# Altium PCB BikerBlinker.PcbDoc
Units mm, origin at the board's own origin, x right, y up, seen from the top; angles counter-clockwise.
Board outline 60 x 57.5 mm, 2 copper layers (Top Layer, Bottom Layer); 44 components, 33 nets, 181 pads, 26 vias.
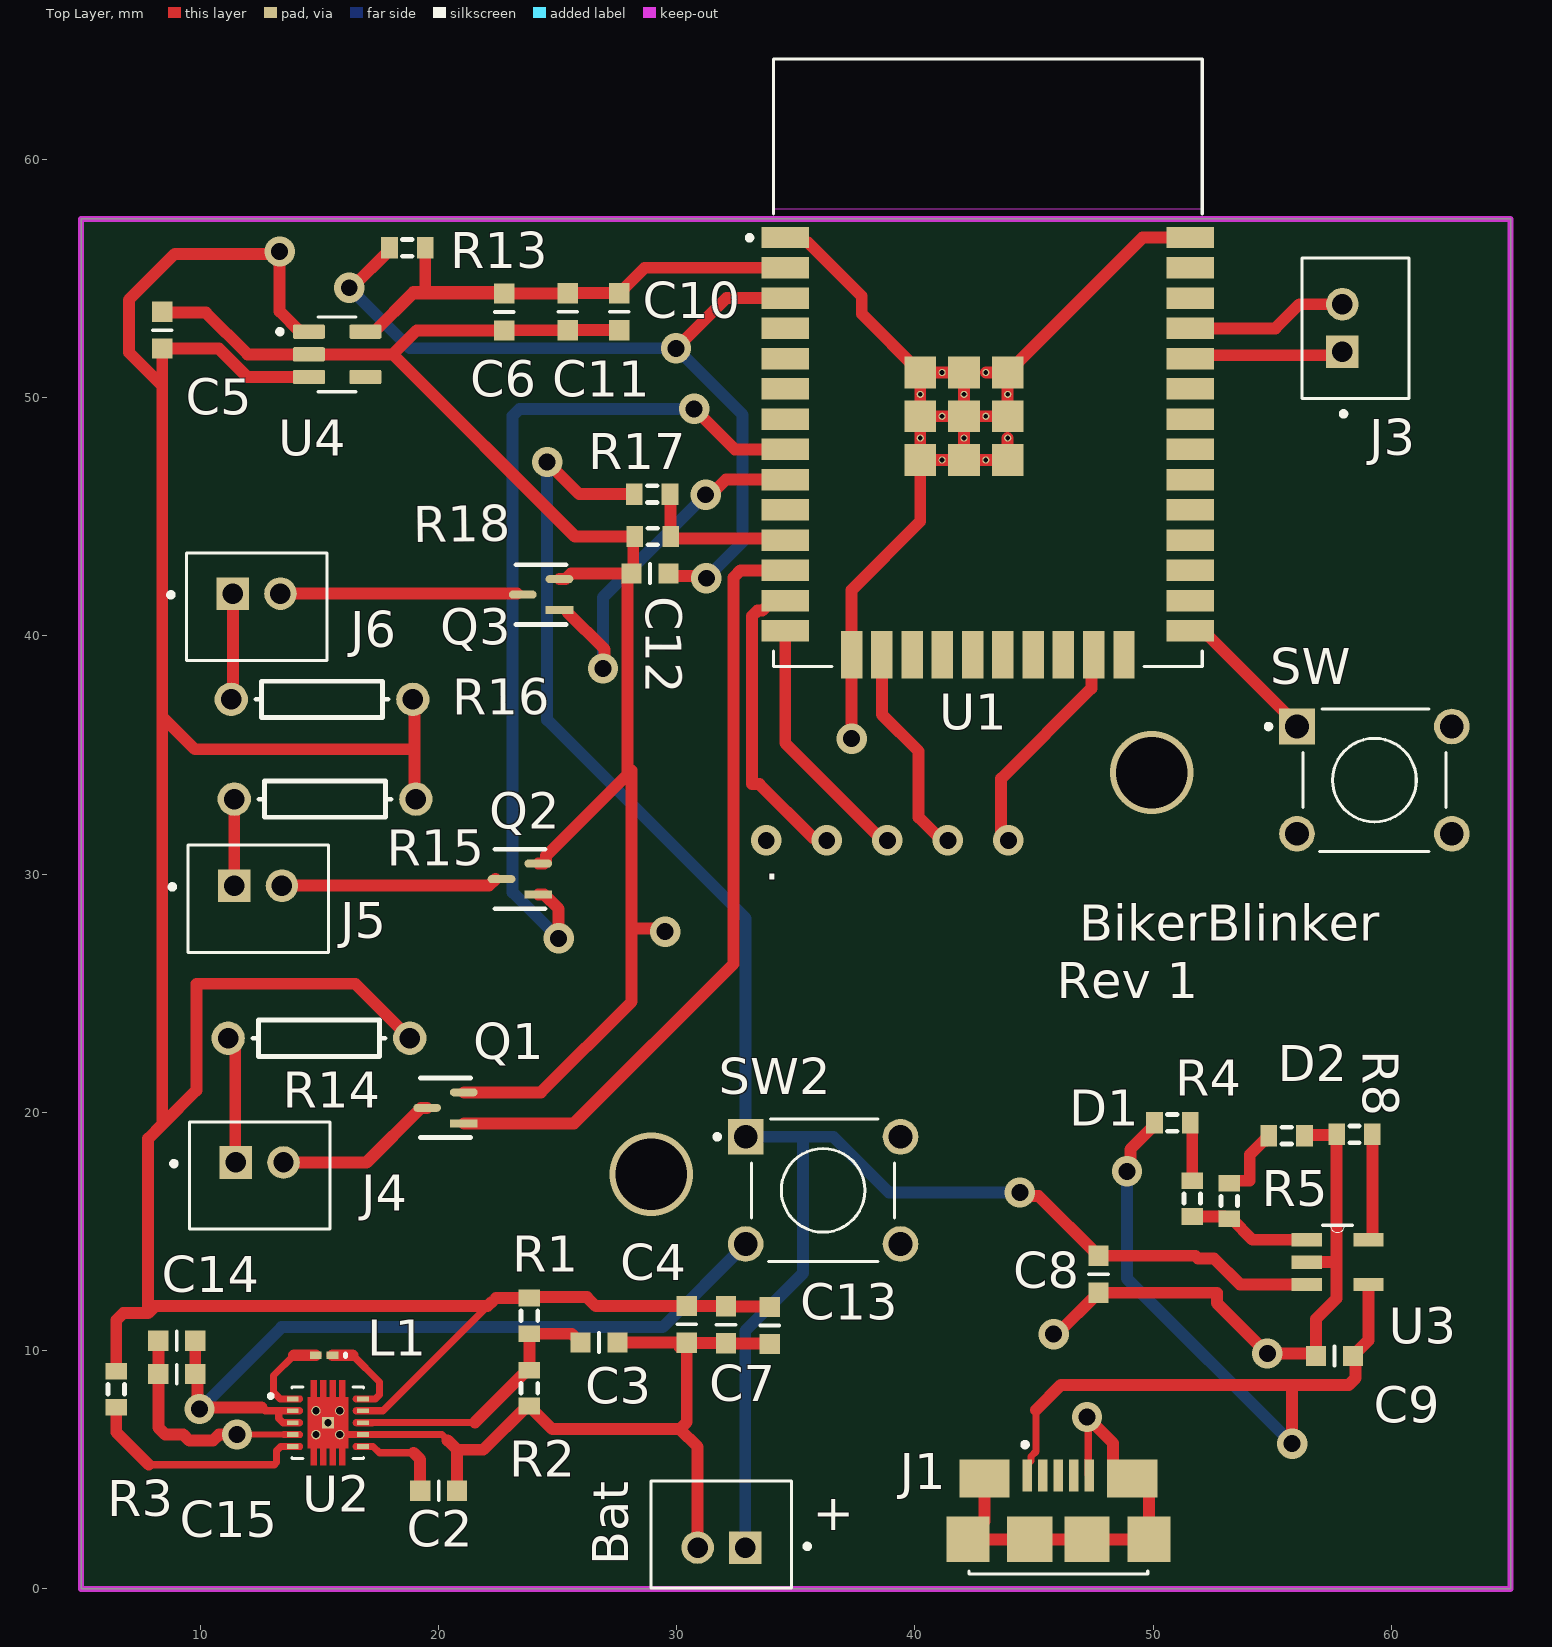
[diagram p0: Top Layer view]
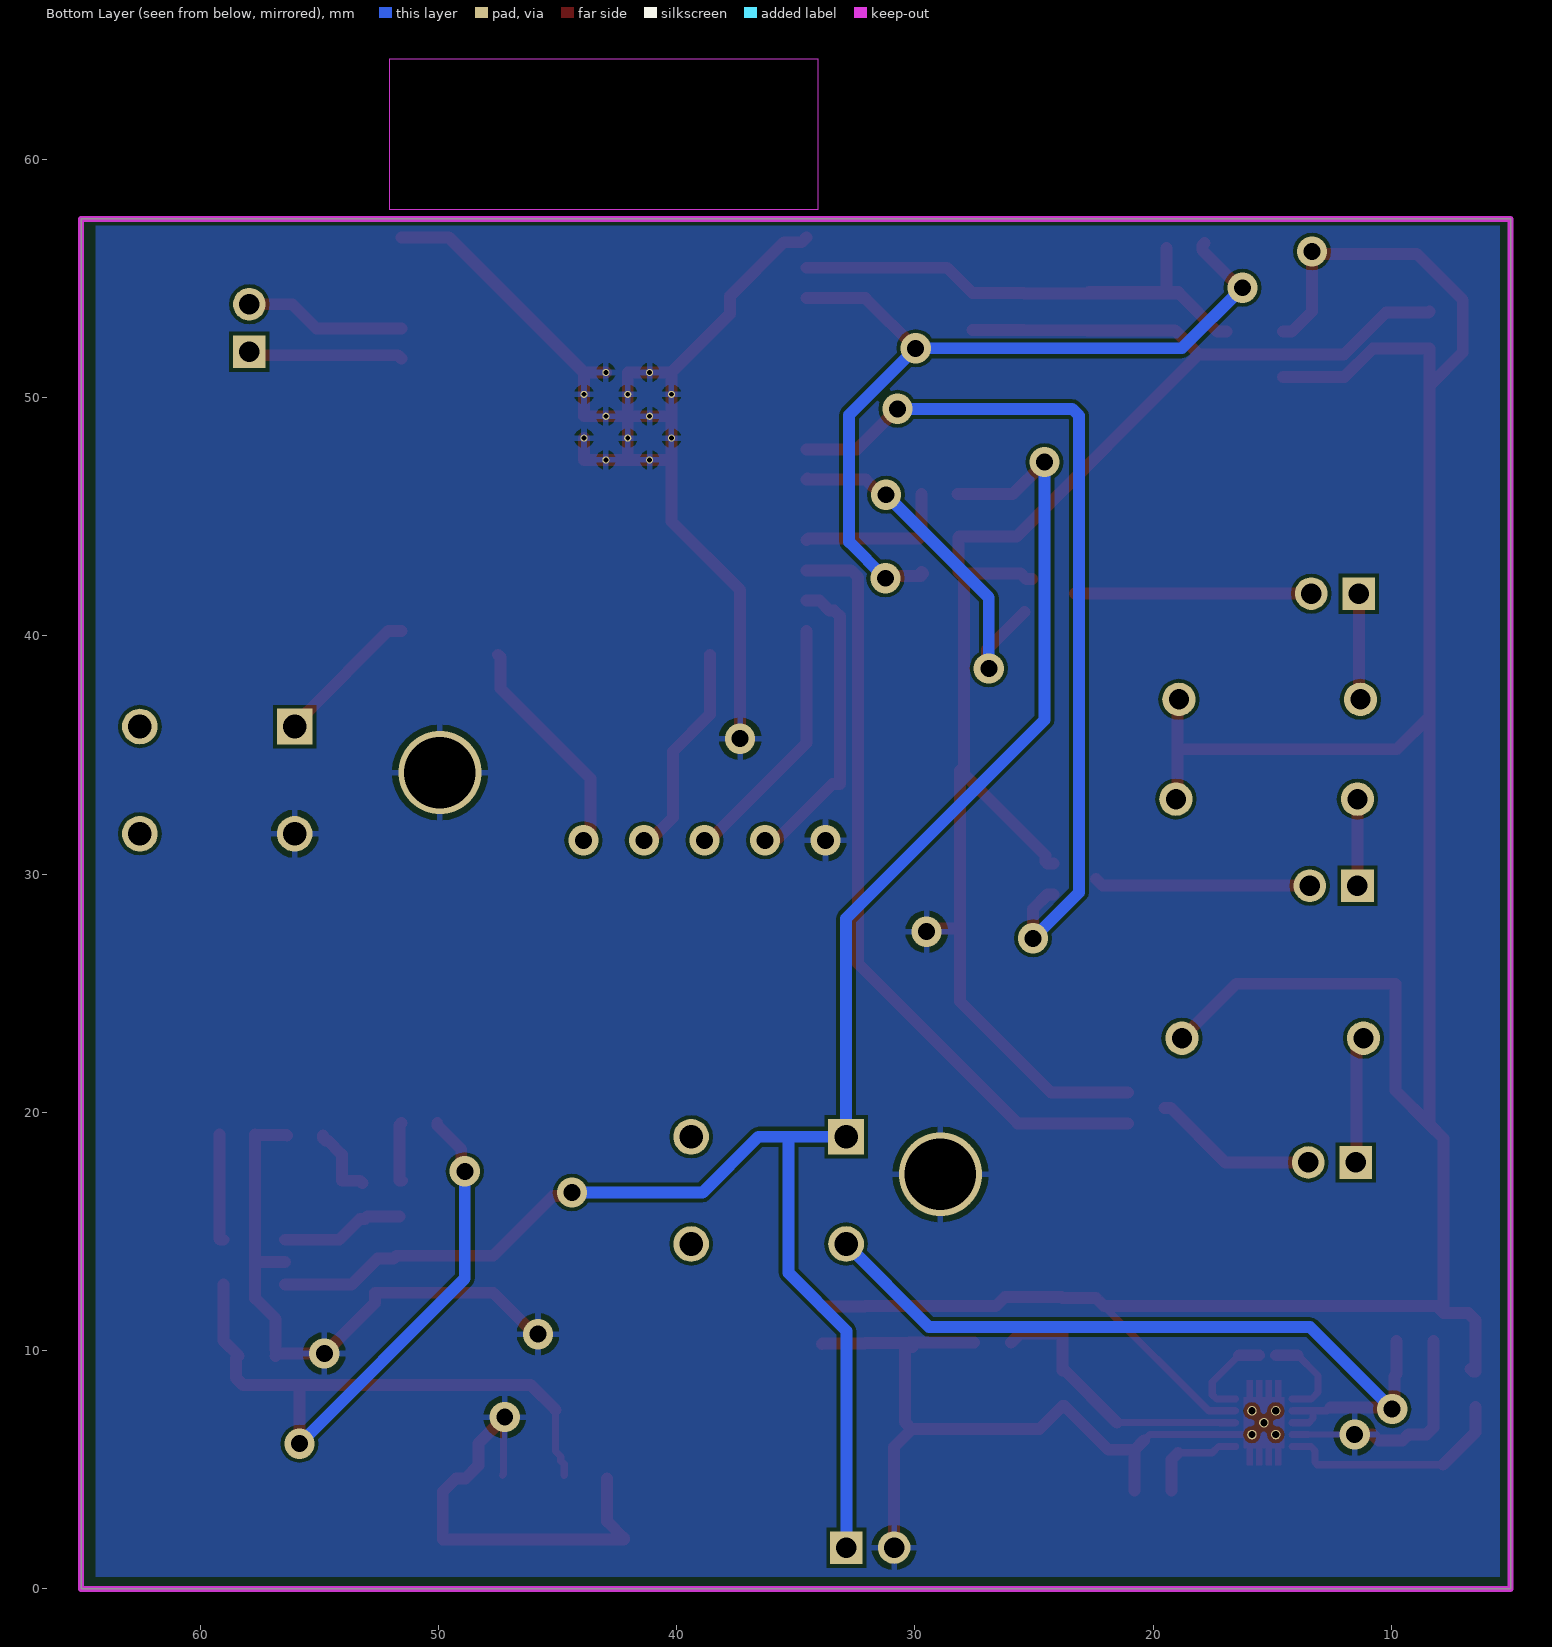
[diagram p1: Bottom Layer view, seen from below]

## Layer stack, top to bottom
Top Solder: solder mask 0.0102, Solder Resist, Dk 3.5
Top Layer: signal copper 0.0356
Dielectric 1: dielectric 0.32, FR-4, Dk 4.8
Bottom Layer: signal copper 0.0356
Bottom Solder: solder mask 0.0102, Solder Resist, Dk 3.5

## Board outline
65,0 5,0 5,57.5 65,57.5

## Design rules (kind name [scope] priority, off if disabled: settings)
Clearance [All] p1: gap=0.152 ignorepadtopadclearanceinfootprint=FALSE
HoleSize [All] p1: absolutevalues=TRUE maxlimit=3 minlimit=0.025 maxpercent=80.000 minpercent=20.000
MinimumSolderMaskSliver [All] p1: minsoldermaskwidth=0.046
NetAntennae [All] p1 off: netantennaetolerance=30
PolygonConnect [All] p1: connectstyle=Relief reliefconductorwidth=0.254 reliefentries=4 polygonreliefangle="90 Angle" airgapwidth=0.254
RoomDefinition BikerBlinker [InComponentClass('BikerBlinker')] p1: confinementstyle=ConfineIn formatcopy=TRUE lockcomponents=FALSE outline -0.025,-0.559 92.5,-0.559 92.5,65 -0.025,65
RoutingVias [All] p1: holewidth=0.3 width=0.6 viastyle="Through Hole" minholewidth=0.3 minwidth=0.6 maxholewidth=3 maxwidth=3.5
SilkToSolderMaskClearance [IsText] p1: minsilkscreentomaskgap=0.254 clearancetoexposedcopper=TRUE
SolderMaskExpansion [All] p1: expansion=0.102 istentingtop=FALSE
Width [All] p1: maxlimit=1 minlimit=0.152 preferedwidth=0.5 minimp=50.000000 maximp=50.000000 favimp=50.000000
26 further rules are at their usual default settings.

## Components (designator, comment, footprint, x,y, rotation, side; value= is the part's Value field where it differs from the comment)
Bat "B2B-PH-K-S" JST_B2B-PH-K-S(LF)(SN) 31.877,2.286 r0 top
C2 "0.10µF" SMD-0603C 20.006,4.12 r90 top
C3 "10pF" SMD-0603C 26.737,10.343 r90 top
C4 "22µF" SMD-0603C 30.42,11.105 r0 top
C5 "1µF" SMD-0603C 8.407,52.832 r180 top
C6 "1µF" SMD-0603C 22.758,53.594 r0 top
C7 "22µF" SMD-0603C 32.071,11.092 r0 top
C8 "4.7µF" SMD-0603C 47.701,13.208 r0 top
C9 "10µF" SMD-0603C 57.607,9.779 r270 top
C10 "10µF" SMD-0603C 27.584,53.607 r0 top
C11 "0.10µF" SMD-0603C 25.425,53.607 r0 top
C12 "0.10µF" SMD-0603C 28.88,42.621 r90 top
C13 "22µF" SMD-0603C 33.9,11.054 r0 top
C14 "10µF" SMD-0603C 9.017,10.414 r270 top
C15 "10µF" SMD-0603C 9.017,9.017 r270 top
D1 "RED" J1-0603 50.8,19.558 r0 top
D2 "GREEN" J1-0603 55.601,19.025 r0 top
J1 "10118192-0002LF" AMPHENOL_10118192-0002LF 46.019,4.758 r0 top
J3 "B2B-PH-K-S" JST_B2B-PH-K-S(LF)(SN) 58.487,52.918 r270 top
J4 "Right" JST_B2B-PH-K-S(LF)(SN) 12.497,17.348 r180 top
J5 "Center" JST_B2B-PH-K-S(LF)(SN) 12.43,28.965 r180 top
J6 "Left" JST_B2B-PH-K-S(LF)(SN) 12.37,41.224 r180 top
L1 "1uH" 0603 15.2,9.809 r180 top
Q1 "2N7002W" FP-419AB-01-IPC_C 20.295,20.193 r180 top
Q2 "2N7002W" FP-419AB-01-IPC_C 23.419,29.794 r180 top
Q3 "2N7002W" FP-419AB-01-IPC_C 24.308,41.732 r180 top
R1 "1M" J1-0603 23.816,11.462 r90 top
R2 "111k" J1-0603 23.816,8.426 r90 top
R3 "1M" J1-0603 6.477,8.382 r90 top
R4 "470" J1-0603 51.638,16.383 r270 top
R5 "470" J1-0603 53.188,16.281 r90 top value=1K
R8 "2k" J1-0603 58.445,19.075 r0 top
R13 "10k" J1-0603 18.694,56.286 r0 top
R14 "20" AXIAL-0.3 14.986,23.114 r0 top
R15 "20" AXIAL-0.3 15.24,33.147 r0 top
R16 "20" AXIAL-0.3 15.113,37.338 r0 top
R17 "20M" J1-0603 28.969,45.949 r180 top
R18 "30M" J1-0603 28.995,44.171 r0 top
SW "1825910-6" SW_1825910-6-4 59.282,33.945 r0 top
SW2 "1825910-6" SW_1825910-6-4 36.143,16.728 r0 top
U1 "ESP32-WROOM-32D" MODULE_ESP32-WROOM-32D 43.056,51.459 r0 top
U2 "TPS63061DSCR" CONV_TPS63061DSCR 15.359,6.977 r0 top locked
U3 "MCP73831T" SOT95P280X145-5N 57.734,13.716 r0 top
U4 "AP2112K-3.3TRG1" SOT95P285X140-5N 15.748,51.816 r0 top

## Footprints (in the part's own frame and the unit in brackets; to place one, negate y for a bottom-side part, rotate by r counter-clockwise, add the part's x,y. Pads: shape width x height; smd on the part's side, far side on the other; paste and mask are expansions set on the pad)
0603 [mm] "Chip Inductor, Body 0.6x0.3mm, IPC High Density"
  rect 0.5x0.3 smd: 1(-0.35,0) 2(0.35,0)
  silkscreen extent -0.9,-0.05 -0.9,0.05, body extent -0.33,-0.18 0.33,0.18, height 0.55
AMPHENOL_10118192-0002LF [mm]
  rect 0.4x1.35 smd: 1(-1.3,0) 2(-0.65,0) 3(0,0) 4(0.65,0) 5(1.3,0)
  rect 2.1x1.6 smd: S1(-3.1,-0.125) S2(3.1,-0.125)
  rect 1.8x1.9 smd: S3(-3.8,-2.675) S6(3.8,-2.675)
  rect 1.9x1.9 smd: S4(-1.2,-2.675) S5(1.2,-2.675)
  silkscreen extent -3.75,-4.13 3.75,1.4
AXIAL-0.3 [mm] "Axial Device, Thru-Hole; 2 Leads; 0.3 in Pin Spacing"
  round 1.4 hole 0.85: 1(-3.81,0) 2(3.81,0)
  silkscreen extent -2.77,-0.76 2.77,0.76
CONV_TPS63061DSCR [mm]
  rect 0.5x0.2 smd: 1(-1.475,1) 2(-1.475,0.5) 3(-1.475,0) 4(-1.475,-0.5) 5(-1.475,-1) 6(1.475,-1) 7(1.475,-0.5) 8(1.475,0) 9(1.475,0.5) 10(1.475,1)
  rect 0.5x0.5 smd: 11(0,0)
  round 0.4 hole 0.3: 12(-0.5,0.5) 13(0.5,0.5) 14(-0.5,-0.5) 15(0,0) 16(0.5,-0.5)
  Top Layer region: 0.725,1.075 0.85,1.075 0.85,-1.075 0.725,-1.075 0.725,-1.775 0.475,-1.775 0.475,-1.075 0.325,-1.075 0.325,-1.775 0.075,-1.775 0.075,-1.075 -0.075,-1.075 -0.075,-1.775 -0.325,-1.775 -0.325,-1.075 -0.475,-1.075 -0.475,-1.775 -0.725,-1.775 -0.725,-1.075 -0.85,-1.075 -0.85,1.075 -0.725,1.075 -0.725,1.775 -0.475,1.775 -0.475,1.075 -0.325,1.075 -0.325,1.775 -0.075,1.775 -0.075,1.075 0.075,1.075 0.075,1.775 0.325,1.775 0.325,1.075 0.475,1.075 0.475,1.775 0.725,1.775
  Top Layer region: 1.9,-0.64 1.19,-0.64 1.183,-0.64 1.175,-0.639 1.168,-0.638 1.161,-0.637 1.154,-0.635 1.147,-0.633 1.14,-0.631 1.133,-0.628 1.126,-0.625 1.12,-0.621 1.114,-0.617 1.108,-0.613 1.102,-0.609 1.096,-0.604 1.091,-0.599 1.086,-0.594 1.081,-0.588 1.077,-0.582 1.073,-0.576 1.069,-0.57 1.065,-0.564 1.062,-0.557 1.059,-0.55 1.057,-0.543 1.055,-0.536 1.053,-0.529 1.052,-0.522 1.051,-0.515 1.05,-0.507 1.05,-0.5 1.05,-0.493 1.051,-0.485 1.052,-0.478 1.053,-0.471 1.055,-0.464 1.057,-0.457 1.059,-0.45 1.062,-0.443 1.065,-0.436 1.069,-0.43 1.073,-0.424 1.077,-0.418 1.081,-0.412 1.086,-0.406 1.091,-0.401 1.096,-0.396 1.102,-0.391 1.108,-0.387 1.114,-0.383 1.12,-0.379 1.126,-0.375 1.133,-0.372 1.14,-0.369 1.147,-0.367 1.154,-0.365 1.161,-0.363 1.168,-0.362 1.175,-0.361 1.183,-0.36 1.19,-0.36 1.9,-0.36
  Top Layer region: -1.183,1.14 -1.175,1.139 -1.168,1.138 -1.161,1.137 -1.154,1.135 -1.147,1.133 -1.14,1.131 -1.133,1.128 -1.126,1.125 -1.12,1.121 -1.114,1.117 -1.108,1.113 -1.102,1.109 -1.096,1.104 -1.091,1.099 -1.086,1.094 -1.081,1.088 -1.077,1.082 -1.073,1.076 -1.069,1.07 -1.065,1.064 -1.062,1.057 -1.059,1.05 -1.057,1.043 -1.055,1.036 -1.053,1.029 -1.052,1.022 -1.051,1.015 -1.05,1.007 -1.05,1 -1.05,0.993 -1.051,0.985 -1.052,0.978 -1.053,0.971 -1.055,0.964 -1.057,0.957 -1.059,0.95 -1.062,0.943 -1.065,0.936 -1.069,0.93 -1.073,0.924 -1.077,0.918 -1.081,0.912 -1.086,0.906 -1.091,0.901 -1.096,0.896 -1.102,0.891 -1.108,0.887 -1.114,0.883 -1.12,0.879 -1.126,0.875 -1.133,0.872 -1.14,0.869 -1.147,0.867 -1.154,0.865 -1.161,0.863 -1.168,0.862 -1.175,0.861 -1.183,0.86 -1.19,0.86 -1.9,0.86 -1.9,1.14 -1.19,1.14
  Top Layer region: -1.183,0.64 -1.175,0.639 -1.168,0.638 -1.161,0.637 -1.154,0.635 -1.147,0.633 -1.14,0.631 -1.133,0.628 -1.126,0.625 -1.12,0.621 -1.114,0.617 -1.108,0.613 -1.102,0.609 -1.096,0.604 -1.091,0.599 -1.086,0.594 -1.081,0.588 -1.077,0.582 -1.073,0.576 -1.069,0.57 -1.065,0.564 -1.062,0.557 -1.059,0.55 -1.057,0.543 -1.055,0.536 -1.053,0.529 -1.052,0.522 -1.051,0.515 -1.05,0.507 -1.05,0.5 -1.05,0.493 -1.051,0.485 -1.052,0.478 -1.053,0.471 -1.055,0.464 -1.057,0.457 -1.059,0.45 -1.062,0.443 -1.065,0.436 -1.069,0.43 -1.073,0.424 -1.077,0.418 -1.081,0.412 -1.086,0.406 -1.091,0.401 -1.096,0.396 -1.102,0.391 -1.108,0.387 -1.114,0.383 -1.12,0.379 -1.126,0.375 -1.133,0.372 -1.14,0.369 -1.147,0.367 -1.154,0.365 -1.161,0.363 -1.168,0.362 -1.175,0.361 -1.183,0.36 -1.19,0.36 -1.9,0.36 -1.9,0.64 -1.19,0.64
  Top Layer region: -1.183,0.14 -1.175,0.139 -1.168,0.138 -1.161,0.137 -1.154,0.135 -1.147,0.133 -1.14,0.131 -1.133,0.128 -1.126,0.125 -1.12,0.121 -1.114,0.117 -1.108,0.113 -1.102,0.109 -1.096,0.104 -1.091,0.099 -1.086,0.094 -1.081,0.088 -1.077,0.082 -1.073,0.076 -1.069,0.07 -1.065,0.064 -1.062,0.057 -1.059,0.05 -1.057,0.043 -1.055,0.036 -1.053,0.029 -1.052,0.022 -1.051,0.015 -1.05,0.007 -1.05,0 -1.05,-0.007 -1.051,-0.015 -1.052,-0.022 -1.053,-0.029 -1.055,-0.036 -1.057,-0.043 -1.059,-0.05 -1.062,-0.057 -1.065,-0.064 -1.069,-0.07 -1.073,-0.076 -1.077,-0.082 -1.081,-0.088 -1.086,-0.094 -1.091,-0.099 -1.096,-0.104 -1.102,-0.109 -1.108,-0.113 -1.114,-0.117 -1.12,-0.121 -1.126,-0.125 -1.133,-0.128 -1.14,-0.131 -1.147,-0.133 -1.154,-0.135 -1.161,-0.137 -1.168,-0.138 -1.175,-0.139 -1.183,-0.14 -1.19,-0.14 -1.9,-0.14 -1.9,0.14 -1.19,0.14
  Top Layer region: -1.183,-0.36 -1.175,-0.361 -1.168,-0.362 -1.161,-0.363 -1.154,-0.365 -1.147,-0.367 -1.14,-0.369 -1.133,-0.372 -1.126,-0.375 -1.12,-0.379 -1.114,-0.383 -1.108,-0.387 -1.102,-0.391 -1.096,-0.396 -1.091,-0.401 -1.086,-0.406 -1.081,-0.412 -1.077,-0.418 -1.073,-0.424 -1.069,-0.43 -1.065,-0.436 -1.062,-0.443 -1.059,-0.45 -1.057,-0.457 -1.055,-0.464 -1.053,-0.471 -1.052,-0.478 -1.051,-0.485 -1.05,-0.493 -1.05,-0.5 -1.05,-0.507 -1.051,-0.515 -1.052,-0.522 -1.053,-0.529 -1.055,-0.536 -1.057,-0.543 -1.059,-0.55 -1.062,-0.557 -1.065,-0.564 -1.069,-0.57 -1.073,-0.576 -1.077,-0.582 -1.081,-0.588 -1.086,-0.594 -1.091,-0.599 -1.096,-0.604 -1.102,-0.609 -1.108,-0.613 -1.114,-0.617 -1.12,-0.621 -1.126,-0.625 -1.133,-0.628 -1.14,-0.631 -1.147,-0.633 -1.154,-0.635 -1.161,-0.637 -1.168,-0.638 -1.175,-0.639 -1.183,-0.64 -1.19,-0.64 -1.9,-0.64 -1.9,-0.36 -1.19,-0.36
  Top Layer region: -1.183,-0.86 -1.175,-0.861 -1.168,-0.862 -1.161,-0.863 -1.154,-0.865 -1.147,-0.867 -1.14,-0.869 -1.133,-0.872 -1.126,-0.875 -1.12,-0.879 -1.114,-0.883 -1.108,-0.887 -1.102,-0.891 -1.096,-0.896 -1.091,-0.901 -1.086,-0.906 -1.081,-0.912 -1.077,-0.918 -1.073,-0.924 -1.069,-0.93 -1.065,-0.936 -1.062,-0.943 -1.059,-0.95 -1.057,-0.957 -1.055,-0.964 -1.053,-0.971 -1.052,-0.978 -1.051,-0.985 -1.05,-0.993 -1.05,-1 -1.05,-1.007 -1.051,-1.015 -1.052,-1.022 -1.053,-1.029 -1.055,-1.036 -1.057,-1.043 -1.059,-1.05 -1.062,-1.057 -1.065,-1.064 -1.069,-1.07 -1.073,-1.076 -1.077,-1.082 -1.081,-1.088 -1.086,-1.094 -1.091,-1.099 -1.096,-1.104 -1.102,-1.109 -1.108,-1.113 -1.114,-1.117 -1.12,-1.121 -1.126,-1.125 -1.133,-1.128 -1.14,-1.131 -1.147,-1.133 -1.154,-1.135 -1.161,-1.137 -1.168,-1.138 -1.175,-1.139 -1.183,-1.14 -1.19,-1.14 -1.9,-1.14 -1.9,-0.86 -1.19,-0.86
  Top Layer region: 1.9,-1.14 1.19,-1.14 1.183,-1.14 1.175,-1.139 1.168,-1.138 1.161,-1.137 1.154,-1.135 1.147,-1.133 1.14,-1.131 1.133,-1.128 1.126,-1.125 1.12,-1.121 1.114,-1.117 1.108,-1.113 1.102,-1.109 1.096,-1.104 1.091,-1.099 1.086,-1.094 1.081,-1.088 1.077,-1.082 1.073,-1.076 1.069,-1.07 1.065,-1.064 1.062,-1.057 1.059,-1.05 1.057,-1.043 1.055,-1.036 1.053,-1.029 1.052,-1.022 1.051,-1.015 1.05,-1.007 1.05,-1 1.05,-0.993 1.051,-0.985 1.052,-0.978 1.053,-0.971 1.055,-0.964 1.057,-0.957 1.059,-0.95 1.062,-0.943 1.065,-0.936 1.069,-0.93 1.073,-0.924 1.077,-0.918 1.081,-0.912 1.086,-0.906 1.091,-0.901 1.096,-0.896 1.102,-0.891 1.108,-0.887 1.114,-0.883 1.12,-0.879 1.126,-0.875 1.133,-0.872 1.14,-0.869 1.147,-0.867 1.154,-0.865 1.161,-0.863 1.168,-0.862 1.175,-0.861 1.183,-0.86 1.19,-0.86 1.9,-0.86
  Top Layer region: 1.9,-0.14 1.19,-0.14 1.183,-0.14 1.175,-0.139 1.168,-0.138 1.161,-0.137 1.154,-0.135 1.147,-0.133 1.14,-0.131 1.133,-0.128 1.126,-0.125 1.12,-0.121 1.114,-0.117 1.108,-0.113 1.102,-0.109 1.096,-0.104 1.091,-0.099 1.086,-0.094 1.081,-0.088 1.077,-0.082 1.073,-0.076 1.069,-0.07 1.065,-0.064 1.062,-0.057 1.059,-0.05 1.057,-0.043 1.055,-0.036 1.053,-0.029 1.052,-0.022 1.051,-0.015 1.05,-0.007 1.05,0 1.05,0.007 1.051,0.015 1.052,0.022 1.053,0.029 1.055,0.036 1.057,0.043 1.059,0.05 1.062,0.057 1.065,0.064 1.069,0.07 1.073,0.076 1.077,0.082 1.081,0.088 1.086,0.094 1.091,0.099 1.096,0.104 1.102,0.109 1.108,0.113 1.114,0.117 1.12,0.121 1.126,0.125 1.133,0.128 1.14,0.131 1.147,0.133 1.154,0.135 1.161,0.137 1.168,0.138 1.175,0.139 1.183,0.14 1.19,0.14 1.9,0.14
  Top Layer region: 1.9,0.36 1.19,0.36 1.183,0.36 1.175,0.361 1.168,0.362 1.161,0.363 1.154,0.365 1.147,0.367 1.14,0.369 1.133,0.372 1.126,0.375 1.12,0.379 1.114,0.383 1.108,0.387 1.102,0.391 1.096,0.396 1.091,0.401 1.086,0.406 1.081,0.412 1.077,0.418 1.073,0.424 1.069,0.43 1.065,0.436 1.062,0.443 1.059,0.45 1.057,0.457 1.055,0.464 1.053,0.471 1.052,0.478 1.051,0.485 1.05,0.493 1.05,0.5 1.05,0.507 1.051,0.515 1.052,0.522 1.053,0.529 1.055,0.536 1.057,0.543 1.059,0.55 1.062,0.557 1.065,0.564 1.069,0.57 1.073,0.576 1.077,0.582 1.081,0.588 1.086,0.594 1.091,0.599 1.096,0.604 1.102,0.609 1.108,0.613 1.114,0.617 1.12,0.621 1.126,0.625 1.133,0.628 1.14,0.631 1.147,0.633 1.154,0.635 1.161,0.637 1.168,0.638 1.175,0.639 1.183,0.64 1.19,0.64 1.9,0.64
  Top Layer region: 1.9,0.86 1.19,0.86 1.183,0.86 1.175,0.861 1.168,0.862 1.161,0.863 1.154,0.865 1.147,0.867 1.14,0.869 1.133,0.872 1.126,0.875 1.12,0.879 1.114,0.883 1.108,0.887 1.102,0.891 1.096,0.896 1.091,0.901 1.086,0.906 1.081,0.912 1.077,0.918 1.073,0.924 1.069,0.93 1.065,0.936 1.062,0.943 1.059,0.95 1.057,0.957 1.055,0.964 1.053,0.971 1.052,0.978 1.051,0.985 1.05,0.993 1.05,1 1.05,1.007 1.051,1.015 1.052,1.022 1.053,1.029 1.055,1.036 1.057,1.043 1.059,1.05 1.062,1.057 1.065,1.064 1.069,1.07 1.073,1.076 1.077,1.082 1.081,1.088 1.086,1.094 1.091,1.099 1.096,1.104 1.102,1.109 1.108,1.113 1.114,1.117 1.12,1.121 1.126,1.125 1.133,1.128 1.14,1.131 1.147,1.133 1.154,1.135 1.161,1.137 1.168,1.138 1.175,1.139 1.183,1.14 1.19,1.14 1.9,1.14
  silkscreen extent -2.48,-1.5 1.5,1.5
FP-419AB-01-IPC_C [mm]
  rect 1.164x0.336 smd: 1(-0.77,0.65)
  rrect100% 1.164x0.336 smd: 2(-0.77,-0.65) 3(0.77,0)
  silkscreen extent -1.05,-1.25 1.05,1.25
J1-0603 [mm] "Chip Resistor, Body 1.6x0.8mm, IPC High Density"
  rect 0.7x0.9 smd: 1(-0.75,0) 2(0.75,0)
  silkscreen extent -0.2,-0.35 0.2,0.35, body extent -0.85,-0.48 0.85,0.48, height 0.9
JST_B2B-PH-K-S(LF)(SN) [mm]
  rect 1.368x1.368 hole 0.86: 1(1,-0.55)
  round 1.368 hole 0.86: 2(-1,-0.55)
  silkscreen extent -2.95,-2.25 3.7,2.25
MODULE_ESP32-WROOM-32D [mm]
  rect 2x0.9 smd: 1(-8.5,5.26) 2(-8.5,3.99) 3(-8.5,2.72) 4(-8.5,1.45) 5(-8.5,0.18) 6(-8.5,-1.09) 7(-8.5,-2.36) 8(-8.5,-3.63) 9(-8.5,-4.9) 10(-8.5,-6.17) 11(-8.5,-7.44) 12(-8.5,-8.71) 13(-8.5,-9.98) 14(-8.5,-11.25) 25(8.5,-11.25) 26(8.5,-9.98) 27(8.5,-8.71) 28(8.5,-7.44) 29(8.5,-6.17) 30(8.5,-4.9) 31(8.5,-3.63) 32(8.5,-2.36) 33(8.5,-1.09) 34(8.5,0.18) 35(8.5,1.45) 36(8.5,2.72) 37(8.5,3.99) 38(8.5,5.26)
  rect 0.9x2 smd: 15(-5.715,-12.25) 16(-4.445,-12.25) 17(-3.175,-12.25) 18(-1.905,-12.25) 19(-0.635,-12.25) 20(0.635,-12.25) 21(1.905,-12.25) 22(3.175,-12.25) 23(4.445,-12.25) 24(5.715,-12.25)
  rect 1.33x1.33 smd: 39_1(-2.835,-0.405) 39_2(-1,-0.405) 39_3(0.835,-0.405) 39_4(-2.835,-2.24) 39_5(-1,-2.24) 39_6(0.835,-2.24) 39_7(-2.835,-4.075) 39_8(-1,-4.075) 39_9(0.835,-4.075)
  round 0.3 hole 0.2: 39_10(-1.917,-0.405) 39_11(-0.082,-0.405) 39_12(-2.835,-1.322) 39_13(-1,-1.322) 39_14(0.835,-1.322) 39_15(-1.917,-2.24) 39_16(-0.082,-2.24) 39_17(-2.835,-3.157) 39_18(-1,-3.157) 39_19(0.835,-3.157) 39_20(-1.917,-4.075) 39_21(-0.082,-4.075)
  Keep-Out Layer region: 9,6.45 -9,6.45 -9,12.75 9,12.75
  Keep-Out Layer region: 9,6.45 -9,6.45 -9,12.75 9,12.75
  silkscreen extent -10.1,-12.75 9,12.75
SMD-0603C [mm]
  rect 0.85x0.85 smd: 1(0,0.775) 2(0,-0.775)
  silkscreen extent -0.4,0 0.4,0, body extent -0.4,-0.8 0.4,0.8, height 0.9
SOT95P280X145-5N [mil]
  rect 50x22 smd: 1(-51,37) 2(-51,0) 3(-51,-37) 4(51,-37) 5(51,37)
  silkscreen extent -24,49 24,61
SOT95P285X140-5N [mm]
  rrect25% 1.35x0.6 smd: 1(-1.185,0.95) 2(-1.185,0) 3(-1.185,-0.95) 4(1.185,-0.95) 5(1.185,0.95)
  silkscreen extent -2.5,-1.57 0.8,1.57, body extent -1.5,-1.4 1.5,1.4, height 1.4
SW_1825910-6-4 [mm]
  rect 1.498x1.498 hole 0.99: 1(-3.25,2.25)
  round 1.498 hole 0.99: 2(3.25,2.25) 3(-3.25,-2.25) 4(3.25,-2.25)
  silkscreen extent -4.54,-3 3,3

## Part data
Bat J3 J4 J5 J6: library part B2B-PH-K-S(LF)(SN), "Connector Header Through Hole 2 position 0.079 _2.00mm_", Package=None, Availability=Unavailable, MF="JST Sales", MP=B2B-PH-K-S_LF__SN_, Price=None, SnapEDA_Link=https://www.snapeda.com/parts/B2B-PH-K-S%28LF%29%28SN%29/JST%20Sales%20America%20Inc./view-part/424103/?ref=snap
C2 C11 C12: library part GCJ188R71C104KA01D, "CAP CER 0.1UF 16V X7R 0603", Digi-Key Part Number=490-5796-1-ND, Manufacturer="Murata Electronics North America", Operating Temperature="-55°C ~ 125°C", Package / Case="0603 (1608 Metric)", Ratings=AEC-Q200, Temperature Coefficient=X7R, Tolerance=±10%, Voltage=16V, @ qty=0, Applications="Automotive, Boardflex Sensitive", Datasheets=http://www.murata.com/~/media/webrenewal/support/library/catalog/products/capacitor/mlcc/c03e.ashx, Factory Stock=0, Features="Soft Termination", Height - Seated (Max)=-, Image=//media.digikey.com/Renders/Murata%20Renders/0603%28LQG18%29.jpg, Lead Spacing=-, Lead Style=-, Minimum Quantity=1, Mounting Type="Surface Mount, MLCC", Packaging="Cut Tape (CT)", Part Number=GCJ188R71C104KA01D, Part Status=Active, Quantity Available=22473, Series=GCJ, Size / Dimension="0.063\" L x 0.031\" W (1.60mm x 0.80mm)", Thickness (Max)="0.035\" (0.90mm)", Unit Price (USD)=0.21
C3: library part GCM1885C1H100FA16D, "CAP CER 10PF 50V NP0 0603", Digi-Key Part Number=490-12530-1-ND, Manufacturer="Murata Electronics North America", Operating Temperature="-55°C ~ 125°C", Package / Case="0603 (1608 Metric)", Ratings=AEC-Q200, Temperature Coefficient="C0G, NP0", Tolerance=±1%, Voltage=50V, @ qty=0, Applications=Automotive, Datasheets=http://psearch.en.murata.com/capacitor/product/GCM1885C1H100FA16%23.pdf, Factory Stock=0, Features=-, Height - Seated (Max)=-, Image=//media.digikey.com/Renders/Murata%20Renders/0603%28GCM188%29.jpg, Lead Spacing=-, Lead Style=-, Minimum Quantity=1, Mounting Type="Surface Mount, MLCC", Packaging="Cut Tape (CT)", Part Number=GCM1885C1H100FA16D, Part Status=Active, Quantity Available=652, Series=GCM, Size / Dimension="0.063\" L x 0.031\" W (1.60mm x 0.80mm)", Thickness (Max)="0.035\" (0.90mm)", Unit Price (USD)=0.11
C4 C7 C13: library part GRM186R60J226ME15D, "CAP CER 22UF 6.3V X5R 0603", Digi-Key Part Number=490-13241-1-ND, Manufacturer="Murata Electronics North America", Operating Temperature="-55°C ~ 85°C", Package / Case="0603 (1608 Metric)", Ratings=-, Temperature Coefficient=X5R, Tolerance=±20%, Voltage=6.3V, @ qty=0, Applications="General Purpose", Datasheets=http://psearch.en.murata.com/capacitor/product/GRM186R60J226ME15%23.pdf, Factory Stock=0, Features="Derating Recommended", Height - Seated (Max)=-, Image=//media.digikey.com/Renders/Murata%20Renders/ZRB-SERIES-0402.jpg, Lead Spacing=-, Lead Style=-, Minimum Quantity=1, Mounting Type="Surface Mount, MLCC", Packaging="Cut Tape (CT)", Part Number=GRM186R60J226ME15D, Part Status=Active, Quantity Available=5072, Series=GRM, Size / Dimension="0.063\" L x 0.031\" W (1.60mm x 0.80mm)", Thickness (Max)="0.028\" (0.70mm)", Unit Price (USD)=0.32
C5 C6: library part GCM188R71C105KA64D, "CAP CER 1UF 16V X7R 0603", Digi-Key Part Number=490-5241-1-ND, Manufacturer="Murata Electronics North America", Operating Temperature="-55°C ~ 125°C", Package / Case="0603 (1608 Metric)", Ratings=AEC-Q200, Temperature Coefficient=X7R, Tolerance=±10%, Voltage=16V, @ qty=0, Applications=Automotive, Datasheets=http://www.murata.com/~/media/webrenewal/support/library/catalog/products/capacitor/mlcc/c03e.ashx, Factory Stock=0, Features=-, Height - Seated (Max)=-, Image=//media.digikey.com/Renders/Murata%20Renders/0603%28GCM188%29.jpg, Lead Spacing=-, Lead Style=-, Minimum Quantity=1, Mounting Type="Surface Mount, MLCC", Packaging="Cut Tape (CT)", Part Number=GCM188R71C105KA64D, Part Status=Active, Quantity Available=9243, Series=GCM, Size / Dimension="0.063\" L x 0.031\" W (1.60mm x 0.80mm)", Thickness (Max)="0.035\" (0.90mm)", Unit Price (USD)=0.24
C8: library part GRJ188C70J475KE11D, "CAP CER 4.7UF 6.3V X7S 0603", Digi-Key Part Number=490-10884-1-ND, Manufacturer="Murata Electronics North America", Operating Temperature="-55°C ~ 125°C", Package / Case="0603 (1608 Metric)", Ratings=-, Temperature Coefficient=X7S, Tolerance=±10%, Voltage=6.3V, @ qty=0, Applications="Boardflex Sensitive", Datasheets=http://www.murata.com/~/media/webrenewal/support/library/catalog/products/capacitor/mlcc/c02e.pdf, Factory Stock=0, Features="Soft Termination", Height - Seated (Max)=-, Image=//media.digikey.com/Renders/Murata%20Renders/0603%28LQG18%29.jpg, Lead Spacing=-, Lead Style=-, Minimum Quantity=1, Mounting Type="Surface Mount, MLCC", Packaging="Cut Tape (CT)", Part Number=GRJ188C70J475KE11D, Part Status=Active, Quantity Available=9234, Series=GRJ, Size / Dimension="0.063\" L x 0.031\" W (1.60mm x 0.80mm)", Thickness (Max)="0.039\" (1.00mm)", Unit Price (USD)=0.34
C9 C10 C14 C15: library part GRM185R60J106ME15D, "CAP CER 10UF 6.3V X5R 0603", Digi-Key Part Number=490-10467-1-ND, Manufacturer="Murata Electronics North America", Operating Temperature="-55°C ~ 85°C", Package / Case="0603 (1608 Metric)", Ratings=-, Temperature Coefficient=X5R, Tolerance=±20%, Voltage=6.3V, @ qty=0, Applications="General Purpose", Datasheets=http://www.murata.com/~/media/webrenewal/support/library/catalog/products/capacitor/mlcc/c02e.pdf, Factory Stock=0, Features="Derating Recommended", Height - Seated (Max)=-, Image=//media.digikey.com/Renders/Murata%20Renders/ZRB-SERIES-0402.jpg, Lead Spacing=-, Lead Style=-, Minimum Quantity=1, Mounting Type="Surface Mount, MLCC", Packaging="Cut Tape (CT)", Part Number=GRM185R60J106ME15D, Part Status=Active, Quantity Available=25068, Series=GRM, Size / Dimension="0.063\" L x 0.031\" W (1.60mm x 0.80mm)", Thickness (Max)="0.022\" (0.55mm)", Unit Price (USD)=0.36
D1 D2: library part LED1, "Typical RED GaAs LED", LatestRevisionDate=08-Jul-2005, LatestRevisionNote="Mech Layer 1 removed.", PackageDescription="LED; 2 Leads", PackageReference=LED-1, Published=8-Jun-2000, Publisher="Altium Limited"
J1: "USB - micro B USB 2.0 Receptacle Connector 5 Position Surface Mount, Right Angle", Package=None, Arrow_Electronics-Purchase-URL=https://snapeda.com/shop?store=Arrow+Electronics&id=551616, Availability=Good, DigiKey-Purchase-URL=https://snapeda.com/shop?store=DigiKey&id=551616, MF="Amphenol ICC", Mouser-Purchase-URL=https://snapeda.com/shop?store=Mouser&id=551616, MP=10118192-0002LF, Price=None, SnapEDA_Link=https://www.snapeda.com/parts/10118192-0002LF/Amphenol%20FCI/view-part/551616/?ref=snap
L1: library part Inductor, "Inductor", Code_IEC=1005, Code_JEITA=0402, LatestRevisionDate=29-May-2009, LatestRevisionNote="IPC-7351 Footprint Added.", PackageDescription="Chip Inductor", PackageReference=0402-A, Published=8-Jun-2000, Publisher="Altium Limited"
Q1 Q2 Q3: library part CMP-07173-000098-1, "MOSFET N-CH 60V 115MA SOT-323", Case/Package=SOT-323, Continuous Drain Current (ID)=115mA, Drain to Source Breakdown Voltage=60V, Drain to Source Resistance=7.5R, Gate to Source Voltage (Vgs)=20V, Input Capacitance=50pF, Max Operating Temperature=150°C, Max Power Dissipation=200mW, Min Operating Temperature=-55°C, Package Quantity=1, Threshold Voltage=1.76V, Contact Plating=Tin, Drain to Source Voltage (Vdss)=60V, Element Configuration=Single, Height=1mm, Lead Free="Lead Free", Length=2mm, Mount="Surface Mount", Number of Elements=1, Number of Pins=3, On-State Resistance=7.5R, Packaging="Tape and Reel", Power Dissipation=200mW, Radiation Hardening=No, Rds On Max=7.5R, REACH SVHC="No SVHC", Turn-Off Delay Time=12.5ns, Turn-On Delay Time=5.85ns, Weight=0.03g, Width=1.25mm
R1 R2 R3 R4 R5 R8 R13 R17 R18: library part Res3, "Resistor", LatestRevisionDate=29-May-2009, LatestRevisionNote="IPC-7351 Footprint Added.", PackageDescription="Chip Resistor", PackageReference=J1-0603, Published=8-Jun-2000, Publisher="Altium Limited"
R14 R15 R16: library part Res1, "Resistor", LatestRevisionDate=17-Jul-2002, LatestRevisionNote="Re-released for DXP Platform.", PackageDescription="Axial Device, Thru-Hole; 2 Leads; 0.3 in Pin Spacing", PackageReference=AXIAL-0.3, Published=8-Jun-2000, Publisher="Altium Limited"
SW SW2: "Switch Push Button OFF _ON_ SPST Round Button 0.05A 24VDC Momentary Contact PC Pins Thru-Hole", Contact_Current_Rating="50 mA", Package=None, Configuration_Pole-Throw="Single Pole - Single Throw", Digi-Key_Part_Number=450-1650-ND, Digi-Key_Purchase_URL=https://www.digikey.com/product-detail/en/te-connectivity-alcoswitch-switches/1825910-6/450-1650-ND/1632536?utm_source=snapeda&utm_medium=aggregator&utm_campaign=symbol, EU_RoHS_Compliance=Compliant, MF="TE Connectivity", MP=1825910-6, SnapEDA_Link=https://www.snapeda.com/parts/1825910-6/TE%20Connectivity%20ALCOSWITCH%20Switches/view-part/424522/?ref=snap, TE_purchase_URL=https://www.te.com/usa-en/product-1825910-6.html?te_bu=Cor&te_type=disp&te_campaign=seda_glo_cor-seda-global-disp-prtnr-fy19-seda-model-bom-cta_sma-317_1&elqCampaignId=32493
U1: "Bluetooth, WiFi 802.11b/g/n, Bluetooth v4.2 + EDR, Class 1, 2 and 3 Transceiver Module 2.4GHz ~ 2.5GHz Integrated, Trace Surface Mount", Package="Module Espressif Systems", Availability=Unavailable, MF="Espressif Systems", MP=ESP32-WROOM-32D, Price=None, SnapEDA_Link=https://www.snapeda.com/parts/ESP32-WROOM-32D/Espressif%20Systems/view-part/2768115/?ref=snap
U2: Package=None, Availability=Unavailable, MP=TPS63061DSCR, Price=None
U3: library part MCP73831T-4ADI/OT, "Charger IC Lithium Ion/Polymer SOT-23-5", Package="SOT-23-5 Microchip", Availability=Unavailable, MF=Microchip, MP=MCP73831T-4ADI/OT, Price=None, SnapEDA_Link=https://www.snapeda.com/parts/MCP73831T-4ADI/OT/Microchip/view-part/1037576/?ref=snap
U4: library part AP2112K-1.8TRG1, "Linear Voltage Regulator IC 1 Output 600mA SOT-25", Package="SOT-753 Diodes Inc.", Availability=Good, MF="Diodes Inc.", MP=AP2112K-3.3TRG1, Price=None, Purchase-URL=https://pricing.snapeda.com/search/part/AP2112K-1.8TRG1/?ref=eda, SnapEDA_Link=https://www.snapeda.com/parts/AP2112K-1.8TRG1/Diodes%20Inc./view-part/553400/?ref=snap

## Via types
v1: diameter 1.27, hole 0.711, Top Layer to Bottom Layer, 24 vias
v2: diameter 3.5, hole 3, Top Layer to Bottom Layer, 2 vias

## Nets (pads, with @x,y where several pads share a name; then routed paths per layer and width w, separated by ;. In a path a pad name is that pad's centre, name@x,y a point inside that pad or via, vN(x,y) a via of type N, cw(c..) or ccw(c..) an arc to the next point about the centre after c; other vN are vias at no path point)
3.3V: C6.1 C10.1 C11.1 R13.2 U1.2 U4.5 | length 24.4
  Top Layer w0.5: U4.5 17.308,52.766 18.911,54.369 C6.1 ; 18.948,54.433 19.406,54.433 ; R13.2 19.444,54.472 19.406,54.433 ; U1.2 28.651,55.449 C10.1 C11.1 25.419,54.375 22.765,54.375 C6.1 ; 19.406,54.433 22.694,54.433 C6.1
5V: C4.1 C5.1 C7.1 C13.1 R1.2 R3.2 R14.2 R15.2 R16.2 U2.9 U4.1 U4.3 | length 132
  Top Layer w0.3: U2.9 17.672,7.477 22.062,11.867 22.189,11.994 ; 22.241,12.045 22.407,12.212
  Top Layer w0.5: R3.2@6.677,9.232 6.577,9.132 R3.2 6.477,11.281 6.77,11.574 7.814,11.574 ; U4.3 11.981,50.866 10.79,52.057 C5.1 8.407,50.5 ; U4.1 14.188,52.766 13.335,53.619 v1(13.335,56.134) 13.233,56.032 8.941,56.032 7.01,54.102 7.01,51.897 8.407,50.5 ; R14.2 16.51,25.4 9.842,25.4 9.842,20.928 8.407,19.494 ; R16.2 18.986,37.274 18.986,35.242 ; R15.2 18.986,33.21 18.986,35.242 ; 22.062,11.867 8.107,11.867 7.814,11.574 ; 22.189,11.994 22.241,12.045 ; 22.407,12.212 R1.2 23.852,12.248 26.229,12.248 26.61,11.867 C7.1 32.09,11.848 33.881,11.848 C13.1 ; 7.814,11.574 7.814,18.9 8.407,19.494 ; 8.407,19.494 8.407,36.613 ; 8.407,36.613 8.407,50.5 ; 8.407,36.613 9.778,35.242 18.986,35.242
"Battery Connection": Bat.1 C8.1 R17.2 SW2.1 U3.3 | length 80.3
  Top Layer w0.5: v1(24.562,47.295) 25.908,45.949 R17.2 ; v1(44.399,16.637) 44.547,16.49 45.195,16.49 C8.1 51.765,13.983 51.884,13.864 52.557,13.864 53.645,12.776 U3.3
  Bottom Layer w0.5: v1(24.562,47.295) 24.562,36.474 32.893,28.143 SW2.1 35.306,18.978 ; Bat.1 32.877,10.832 35.306,13.261 35.306,18.978 ; v1(44.399,16.637) 38.917,16.637 36.576,18.978 35.306,18.978
BatV: R17.1 R18.2 U1.11 | length 6.7
  Top Layer w0.5: R17.1 29.732,45.936 29.732,44.183 R18.2 29.821,44.095 34.48,44.095 U1.11
Center: Q2.1 U1.8 | length 37.3
  Top Layer w0.5: Q2.1 24.439,29.144 25.044,28.539 v1(25.044,27.305) ; v1(30.734,49.53) 32.435,47.829 U1.8
  Bottom Layer w0.5: v1(25.044,27.305) 23.114,29.235 23.114,49.237 23.407,49.53 v1(30.734,49.53)
GND: Bat.2 C2.2 C3.2 C4.2 C5.2 C6.2 C7.2 C8.2 C9.2 C10.2 C11.2 C12.1 C13.2 C14.2 C15.2 D2.2 J1.5 J1.S1 J1.S2 J1.S3 J1.S4 J1.S5 J1.S6 Q1.2 Q2.2 Q3.2 R2.1 R8.1 R18.1 SW.3 U1.1 U1.15 U1.38 U1.39_1 U1.39_2 U1.39_3 U1.39_4 U1.39_5 U1.39_6 U1.39_7 U1.39_8 U1.39_9 U1.39_10 U1.39_11 U1.39_12 U1.39_13 U1.39_14 U1.39_15 U1.39_16 U1.39_17 U1.39_18 U1.39_19 U1.39_20 U1.39_21 U2.4 U2.7 U2.11 U2.12 U2.13 U2.14 U2.15 U2.16 U3.2 U4.2 | length 210.8
  Top Layer w0.25: v1(11.548,6.482) U2.4@13.884,6.482
  Top Layer w0.3: U2.16 U2.7 20.145,6.477 20.387,6.234 ; v1@47.271,7.161 47.271,4.805 J1.5
  Top Layer w0.5: C14.2 C15.2 8.242,6.775 8.535,6.482 9.288,6.482 9.547,6.223 10.536,6.223 10.795,6.482 v1(11.548,6.482) ; C5.2 8.444,53.57 10.236,53.57 11.99,51.816 U4.2 18.085,51.816 ; 20.387,6.234 20.781,5.84 ; C2.2 20.781,5.84 ; Q1.2 24.297,20.843 28.105,24.65 28.105,27.711 ; Q2.2 24.439,30.444 24.521,30.526 24.521,30.776 27.94,34.195 ; Q3.2 25.328,42.382 25.567,42.621 C12.1 ; C3.2 30.245,10.343 C4.2@30.346,10.242 ; C10.2 C11.2 25.419,52.826 22.765,52.826 C6.2 19.088,52.819 18.085,51.816 ; v1(29.515,27.584) 29.388,27.711 28.105,27.711 ; C4.2@30.105,10.155 30.258,10.155 C4.2@30.346,10.242 ; C4.2@30.42,10.317 C7.2 32.09,10.298 33.881,10.298 C13.2 ; Bat.2 30.877,5.961 30.127,6.711 ; U1.1 34.756,56.519 35.505,56.519 37.765,54.26 37.765,53.511 U1.39_1 ; v1(37.341,35.687) U1.15 37.341,41.924 40.221,44.804 U1.39_7 ; J1.S1 42.919,2.833 42.219,2.133 J1.S3 J1.S4 J1.S5 J1.S6 49.819,4.083 49.269,4.633 J1.S2 48.869,4.633 48.319,5.183 48.319,6.114 47.271,7.161 v1(47.219,7.214) ; U1.39_11 U1.39_3 ; U1.39_19 U1.39_9 U1.39_21 U1.39_8 ; v1@45.892,10.623 C8.2 52.667,12.433 52.667,12.001 v1(54.788,9.881) 56.731,9.881 C9.2 ; U1.38 49.556,56.719 U1.39_3 ; D2.2 56.376,19.05 57.67,19.05 R8.1 57.695,13.691 ; U3.2 57.67,13.716 57.695,13.691 ; C9.2@56.832,10.033 56.832,11.334 57.695,12.197 57.695,13.691 ; 18.085,51.816 25.73,44.171 28.145,44.171 28.175,44.141 28.175,42.691 C12.1 ; 20.781,5.84 21.881,5.84 23.716,7.676 R2.1 24.781,6.711 30.127,6.711 ; 27.94,34.195 28.105,34.36 28.105,27.711 ; 27.94,34.195 27.94,42.456 C12.1 ; 30.127,6.711 30.42,7.003 30.42,10.168 C4.2@30.346,10.242 ; U1.39_7 U1.39_17 U1.39_4 ; U1.39_7 U1.39_20 U1.39_8 ; U1.39_4 U1.39_12 U1.39_1 ; U1.39_4 U1.39_15 U1.39_5 ; U1.39_1 U1.39_10 U1.39_2 U1.39_13 U1.39_5 ; U1.39_8 U1.39_18 U1.39_5 ; U1.39_5 U1.39_16 U1.39_6 U1.39_14 U1.39_3
  Bottom Layer w0.5: v1@11.548,6.469 v1(11.548,6.482)
  other v1: 45.822,10.693 33.757,31.42
  other v2: 28.931,17.399 49.936,34.265
Left: Q3.1 U1.9 | length 15.8
  Top Layer w0.5: Q3.1@25.41,41 26.975,39.435 26.975,38.706 v1(26.903,38.633) ; v1(31.217,45.923) 31.425,45.923 32.061,46.559 U1.9 U1.9@34.506,46.609
  Bottom Layer w0.5: v1(26.903,38.633) 26.903,41.609 v1(31.217,45.923)
MTCK: U1.16 | length 8.9
  Top Layer w0.5: U1.16 38.611,36.7 40.153,35.158 40.153,32.384 41.123,31.415 v1@41.123,31.394
  other v1: 41.377,31.42
MTDI: U1.14 | length 10.5
  Top Layer w0.5: U1.14 34.556,35.497 v1@38.633,31.42
  other v1: 38.837,31.42
MTDO: U1.23 | length 9.5
  Top Layer w0.5: v1@43.612,31.369 43.612,34.011 47.4,37.799 47.4,39.108 U1.23
  other v1: 43.917,31.42
MTMS: U1.13 | length 12.8
  Top Layer w0.5: U1.13 34.006,41.479 33.589,41.061 33.39,41.061 33.154,40.826 33.154,33.775 33.466,33.775 35.72,31.521 v1@36.297,31.521
  other v1: 36.297,31.42
NetC2_1: C2.1 U2.6 | length 3.9
  Top Layer w0.3: U2.6 17.259,5.977 17.521,5.715 18.957,5.715
  Top Layer w0.5: 18.957,5.715 19.231,5.441 C2.1
NetC3_1: C3.1 R1.1 R2.2 U2.8 | length 11.7
  Top Layer w0.3: U2.8@16.834,6.985 21.525,6.985
  Top Layer w0.5: 21.525,6.985 23.716,9.176 R2.2 R1.1 25.593,10.712 C3.1
NetC9_1: C9.1 D1.1 J1.1 U3.4 | length 40.5
  Top Layer w0.3: J1.1 44.719,5.233 44.866,5.38 44.866,5.558 45.085,5.777 45.085,7.518
  Top Layer w0.5: 45.085,7.518 46.126,8.56 55.829,8.56 58.203,8.56 58.496,8.853 58.496,9.665 C9.1 59.03,10.426 U3.4 ; v1@48.895,17.734 v1(48.895,17.526) 49.042,17.673 49.042,18.45 50.05,19.458 D1.1 ; v1(55.829,6.096) 55.829,8.509
  Bottom Layer w0.5: v1(48.895,17.526) 48.895,13.03 v1(55.829,6.096)
NetC12_2: C12.2 R13.1 U1.3 | length 36.1
  Top Layer w0.5: v1(16.256,54.61) 16.368,54.61 17.944,56.186 R13.1 17.944,56.386 R13.1@17.844,56.486 ; C12.2@29.718,42.685 C12.2 29.756,42.52 31.14,42.52 v1(31.242,42.418) ; v1(29.972,52.07) 32.081,54.179 U1.3
  Bottom Layer w0.5: v1(16.256,54.61) 18.796,52.07 v1(29.972,52.07) 32.766,49.276 32.766,43.942 v1(31.242,42.418)
NetC14_1: C14.1 C15.1 SW2.3 U2.2 U2.3 | length 33.7
  Top Layer w0.3: 12.573,7.62 12.716,7.477 13.3,7.477 ; U2.3 13.476,6.977 13.3,7.153 13.3,7.477 ; U2.2 13.3,7.477
  Top Layer w0.5: C14.1 C15.1 9.883,8.926 9.883,7.639 v1(9.973,7.549) 10.044,7.62 12.573,7.62
  Bottom Layer w0.5: v1(9.973,7.549) 13.416,10.992 29.407,10.992 SW2.3
NetD1_2: D1.2 R4.1 | length 2.6
  Top Layer w0.5: R4.1@51.538,17.133 R4.1 51.638,19.47 D1.2
NetD2_1: D2.1 R5.2 | length 3.2
  Top Layer w0.5: R5.2 53.288,17.131 54.05,17.131 54.051,17.133 54.051,18.225 54.651,18.825 54.751,18.825 54.851,18.925 D2.1
NetJ4_1: J4.1 R14.1 | length 5.4
  Top Layer w0.5: R14.1 11.47,22.82 11.47,17.925 J4.1 J4.1@11.476,17.877
NetJ4_2: J4.2 Q1.3 | length 7
  Top Layer w0.5: J4.2 16.98,17.898 19.275,20.193 Q1.3
NetJ5_1: J5.1 R15.1 | length 3.6
  Top Layer w0.5: J5.1 R15.1
NetJ5_2: J5.2 Q2.3 | length 9.1
  Top Layer w0.5: J5.2 22.119,29.515 Q2.3@22.399,29.794
NetJ6_1: J6.1 R16.1 | length 4.1
  Top Layer w0.5: R16.1@11.266,37.668 11.37,37.772 J6.1
NetJ6_2: J6.2 Q3.3 | length 9.9
  Top Layer w0.5: J6.2 Q3.3@23.292,41.774
NetL1_1: L1.1 U2.10 | length 3.7
  Top Layer w0.3: 16.399,9.809 17.526,8.683 17.526,8.153 17.35,7.977 U2.10
  Top Layer w0.5: L1.1 16.399,9.809
NetL1_2: L1.2 U2.1 | length 3.7
  Top Layer w0.3: U2.1 13.359,7.977 13.081,8.255 13.081,8.955 13.936,9.809
  Top Layer w0.5: 13.936,9.809 L1.2
NetR3_1: R3.1 U2.5 | length 9.6
  Top Layer w0.3: 7.84,5.212 13.114,5.212 13.208,5.306 13.208,5.801 13.384,5.977 U2.5
  Top Layer w0.5: R3.1 6.477,6.575 7.84,5.212
NetR4_2: R4.2 R5.1 U3.1 | length 5.2
  Top Layer w0.5: R4.2 52.986,15.633 53.088,15.531 R5.1 53.288,15.531 54.163,14.656 U3.1
NetR8_2: R8.2 U3.5 | length 4.6
  Top Layer w0.5: U3.5 59.166,14.656 59.195,14.685 R8.2
NetSW_1: SW.1 U1.25 | length 6.2
  Top Layer w0.5: U1.25 52.106,40.209 55.533,36.782 55.533,36.694 SW.1
Right: Q1.1 U1.12 | length 32.6
  Top Layer w0.5: Q1.1 25.69,19.543 32.385,26.238 32.385,42.456 32.678,42.749 U1.12
RX: J3.1 U1.34 | length 6.5
  Top Layer w0.5: U1.34 51.695,51.778 57.798,51.778 J3.1
TX: J3.2 U1.35 | length 6.8
  Top Layer w0.5: U1.35 55.125,52.909 56.133,53.918 J3.2
pads on no net: J1.2 J1.3 J1.4 SW2.2 SW2.4 SW.2 SW.4 U1.4 U1.5 U1.6 U1.7 U1.10 U1.17 U1.18 U1.19 U1.20 U1.21 U1.22 U1.24 U1.26 U1.27 U1.28 U1.29 U1.30 U1.31 U1.32 U1.33 U1.36 U1.37 U4.4

## Polygon pours and split planes (outlines as drawn)
GND on Bottom Layer "NONET_L01_P-001" (solid, pour order 0): 64.389,0.508 5.461,0.508 5.461,57.277 64.389,57.277
GND on Bottom Layer "NONET_L01_P-001" (solid, pour order 1): 69.215,34.798

## Keep-outs
Keep-Out Layer:
  the board outline again, w0.254

## Silkscreen, mask and mechanical layers (free items; w line width, h text height)
Top Overlay:
  text "." at 33.68,29.769 h1.52
  text "BikerBlinker" at 46.888,27.203 h1.52
  text "Rev 1" at 45.949,24.79 h1.52
  text "+" at 35.712,2.464 h1.52

## Text inside footprints (layer, text, board x,y; h text height)
J1: Mechanical 13 "PCB Edge" at 51.119,0.958 h0.41
U1: Mechanical 13 "ANTENNA" at 37.056,60.459 h1.78